# Altium PCB TITAN_ADAPTER.PcbDoc
Units mm, origin at the board's own origin, x right, y up, seen from the top; angles counter-clockwise.
Board outline 14.73 x 9.4 mm, 2 copper layers (Top Layer, Bottom Layer); 4 components, 7 nets, 22 pads, 0 vias.
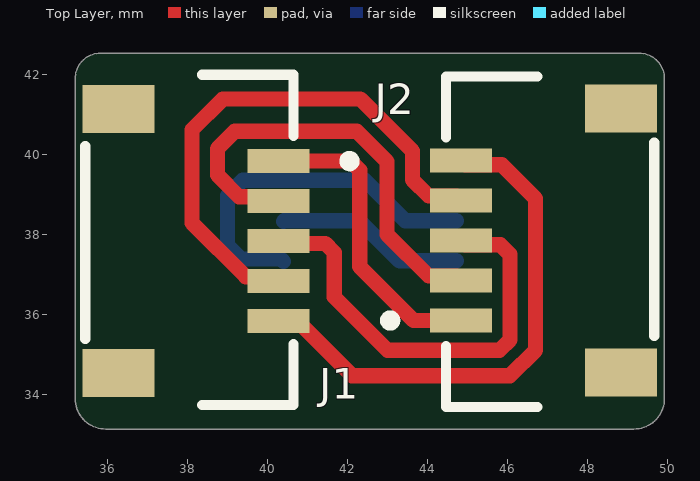
[diagram p0: Top Layer view]
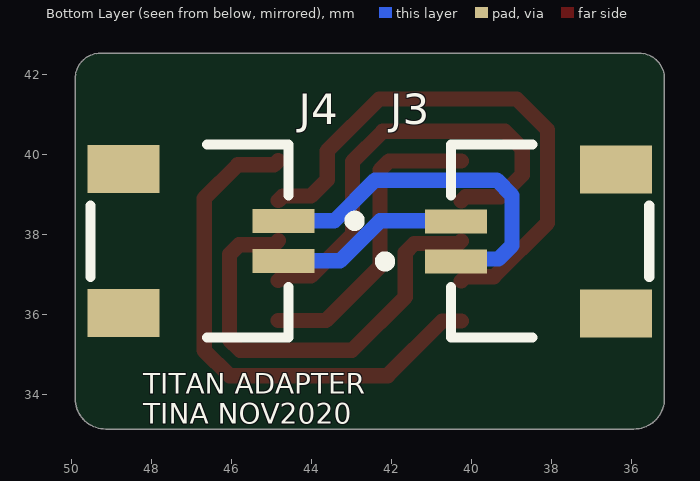
[diagram p1: Bottom Layer view, seen from below]

## Layer stack, top to bottom
Top Solder: solder mask 0.0102, Solder Resist, Dk 3.5
Top Layer: signal copper 0.0356
Dielectric 1: dielectric 0.32, FR-4, Dk 4.8
Bottom Layer: signal copper 0.0356
Bottom Solder: solder mask 0.0102, Solder Resist, Dk 3.5

## Board outline
35.179,33.909 35.179,41.91 cw(c35.814,41.91) 35.814,42.545 49.276,42.545 cw(c49.276,41.91) 49.911,41.91 49.911,33.909 cw(c49.149,33.909) 49.149,33.147 35.941,33.147 cw(c35.941,33.909)

## Design rules (kind name [scope] priority, off if disabled: settings)
Clearance [All] p1: gap=0.254 ignorepadtopadclearanceinfootprint=FALSE except(0: Arc-Hole Track-Hole SMDPad-Hole THPad-Hole Via-Hole Fill-Hole Poly-Hole Region-Hole Text-Hole)
PolygonConnect [All] p1: connectstyle=Relief reliefconductorwidth=0.254 reliefentries=4 polygonreliefangle="90 Angle" airgapwidth=0.254
RoomDefinition TITAN_ADAPTER [InComponentClass('TITAN_ADAPTER')] p1: confinementstyle=ConfineIn formatcopy=TRUE lockcomponents=FALSE outline 26.416,27.432 58.166,27.432 58.166,48.641 26.416,48.641
RoutingVias [All] p1: holewidth=0.711 width=1.27 viastyle="Through Hole" minholewidth=0.711 minwidth=1.27 maxholewidth=0.711 maxwidth=1.27
SolderMaskExpansion [All] p1: expansion=0.102 istentingtop=FALSE
Width [All] p1: maxlimit=0.762 minlimit=0.254 preferedwidth=0.381
30 further rules are at their usual default settings.

## Components (designator, comment, footprint, x,y, rotation, side; value= is the part's Value field where it differs from the comment)
J1 "JST 5POS" JST-5 44.831,35.862 r90 top
J2 "JST 5POS" JST-5 40.259,39.846 r270 top
J3 "JST 2POS" JST-2 40.386,37.338 r90 bottom
J4 "JST 2POS" JST-2 44.704,38.354 r270 bottom

## Footprints (in the part's own frame and the unit in brackets; to place one, negate y for a bottom-side part, rotate by r counter-clockwise, add the part's x,y. Pads: shape width x height; smd on the part's side, far side on the other; paste and mask are expansions set on the pad)
JST-2 [mm]
  rect 1.2x1.8 smd: 0(-1.3,-4) 0(2.3,-4)
  rect 0.6x1.55 smd: 1(0,0) 2(1,0)
  silkscreen extent -1.91,-4.83 2.92,1.91, body extent -1.46,-4.63 2.54,0.32, height 2.97
JST-5 [mm]
  rect 1.2x1.8 smd: 0(-1.3,-4) 0(5.3,-4)
  rect 0.6x1.55 smd: 1(0,0) 2(1,0) 3(2,0) 4(3,0) 5(4,0)
  silkscreen extent -2.16,-4.83 6.1,1.9, body extent -1.47,-4.57 5.53,0.38, height 2.97

## Part data
J1 J2: library part SM05B-SRSS-TB(LF)(SN), "CONN HEADER SMD R/A 5POS 1MM, side mount", Color=Natural, Contact Resistance=40mR, Current Rating=1A, Flammability Rating="UL94 V-0", Housing Color=Beige, Insulation Resistance=100MR, Manufacturer=JST, Max Operating Temperature=85°C, Max Voltage Rating (AC)=50V, Min Operating Temperature=-25°C, Supplier Part Number 1=455-1805-1-ND, Category=Connectors, ComponentLink1Description=https://datasheet.ciiva.com/11752/0900766b8082f543-11752177.pdf?src-supplier=RSComponents, ComponentLink1URL=https://datasheet.ciiva.com/11752/0900766b8082f543-11752177.pdf?src-supplier=RSComponents, ComponentLink2Description=https://datasheet.ciiva.com/26894/getdatasheetpartid-473065-26894947.pdf?src-supplier=Verical, ComponentLink2URL=https://datasheet.ciiva.com/26894/getdatasheetpartid-473065-26894947.pdf?src-supplier=Verical, ComponentLink3Description=https://datasheet.ciiva.com/26938/getdatasheetpartid-744366-26938333.pdf?src-supplier=Verical, ComponentLink3URL=https://datasheet.ciiva.com/26938/getdatasheetpartid-744366-26938333.pdf?src-supplier=Verical, ComponentLink4Description=https://datasheet.ciiva.com/16217/sm05b-srss-tblfsn-16217550.pdf?src-supplier=Future+Electronics, ComponentLink4URL=https://datasheet.ciiva.com/16217/sm05b-srss-tblfsn-16217550.pdf?src-supplier=Future+Electronics, ComponentLink5Description=https://datasheet.ciiva.com/712/esr-712752.pdf?src-supplier=Digi-Key, ComponentLink5URL=https://datasheet.ciiva.com/712/esr-712752.pdf?src-supplier=Digi-Key, ComponentLink6Description=https://datasheet.ciiva.com/8052/esr-8052277.pdf?src-supplier=Element14, ComponentLink6URL=https://datasheet.ciiva.com/8052/esr-8052277.pdf?src-supplier=Element14, ComponentLink7Description=https://datasheet.ciiva.com/730/esr-730646.pdf?src-supplier=Digi-Key, ComponentLink7URL=https://datasheet.ciiva.com/730/esr-730646.pdf?src-supplier=Digi-Key, ComponentLink8Description=https://datasheet.ciiva.com/712/esr-712751.pdf?src-supplier=Digi-Key, ComponentLink8URL=https://datasheet.ciiva.com/712/esr-712751.pdf?src-supplier=Digi-Key, Connector Type="Male Pin", Contact Material="Copper Alloy", Contact Plating=Tin,Copper,Lead, Depth=4.95mm, Gender=Male, Housing Material=Polyamide, Lead Free="Lead Free", Lead Pitch=1mm, Length=7mm, Manufacturer Part Number=SM05B-SRSS-TB(LF)(SN), Material=Polyamide, Max Current Rating=1A, Max Voltage Rating (DC)=50V, Mount="Surface Mount", Number of Contacts=5, Number of Positions=5, Number of Rows=1, Orientation="Right Angle", Packaging="Tape and Reel", Pitch=1mm, Pricing 1="1=0.68000, 10=0.64200, 100=0.49200, 500=0.42782, 1000=0.35294 (USD)", REACH SVHC="No SVHC", RoHS=Yes, Stock 1=368198, Supplier 1=Digi-Key, Termination=Solder, Voltage Rating=50V, Voltage Rating (AC)=50V
J3 J4: library part SM02B-SRSS-TB(LF)(SN), "Conn Shrouded Header HDR 2 POS 1mm Solder RA SMD T/R, side mount", Color=Natural, Contact Resistance=40mR, Current Rating=700mA, Flammability Rating="UL94 V-0", Housing Color=Beige, Insulation Resistance=100MR, Manufacturer=JST, Max Current Rating=1A, Max Operating Temperature=85°C, Max Voltage Rating (AC)=50V, Min Operating Temperature=-25°C, Supplier Part Number 1=33P8179, Category=Connectors, ComponentLink1Description=https://datasheet.ciiva.com/26924/getdatasheetpartid-640850-26924055.pdf?src-supplier=Verical, ComponentLink1URL=https://datasheet.ciiva.com/26924/getdatasheetpartid-640850-26924055.pdf?src-supplier=Verical, ComponentLink2Description=https://datasheet.ciiva.com/16391/sm02b-srss-tblfsn-16391308.pdf?src-supplier=Future+Electronics, ComponentLink2URL=https://datasheet.ciiva.com/16391/sm02b-srss-tblfsn-16391308.pdf?src-supplier=Future+Electronics, ComponentLink3Description=https://datasheet.ciiva.com/712/esr-712467.pdf?src-supplier=Digi-Key, ComponentLink3URL=https://datasheet.ciiva.com/712/esr-712467.pdf?src-supplier=Digi-Key, ComponentLink4Description=https://datasheet.ciiva.com/712/esr-712468.pdf?src-supplier=Digi-Key, ComponentLink4URL=https://datasheet.ciiva.com/712/esr-712468.pdf?src-supplier=Digi-Key, ComponentLink5Description=https://datasheet.ciiva.com/730/esr-730600.pdf?src-supplier=Digi-Key, ComponentLink5URL=https://datasheet.ciiva.com/730/esr-730600.pdf?src-supplier=Digi-Key, ComponentLink6Description=https://datasheet.ciiva.com/8052/91630-8052284.pdf?src-supplier=Element14, ComponentLink6URL=https://datasheet.ciiva.com/8052/91630-8052284.pdf?src-supplier=Element14, Connector Type="Header,Male Pin", Contact Material="Copper Alloy,Copper", Contact Plating=Tin,Copper,Lead, Contact Shape=Square, Depth=4.95mm, Fastening Type=Push,Pull, Housing Material=Polyamide, Insulation Color=Natural, Insulation Material=Nylon, Lead Free="Lead Free", Lead Pitch=1mm, Length=4mm, Manufacturer Part Number=SM02B-SRSS-TB(LF)(SN), Material=Polyamide, Mount="Surface Mount", Number of Contacts=2, Number of Positions=2, Number of Rows=1, Orientation="Right Angle", Packaging="Tape and Reel", Pitch=1mm, Pricing 1="1=0.41900, 10=0.39400, 25=0.33800, 50=0.29800, 100=0.29600, 250=0.27100, 500=0.25500, 1000=0.23500 (USD)", REACH SVHC="No SVHC", RoHS=Yes, Stock 1=9138, Supplier 1=Newark, Termination=Solder, Voltage Rating=50V, Voltage Rating (AC)=50V

## Nets (pads, with @x,y where several pads share a name; then routed paths per layer and width w, separated by ;. In a path a pad name is that pad's centre, name@x,y a point inside that pad or via, vN(x,y) a via of type N, cw(c..) or ccw(c..) an arc to the next point about the centre after c; other vN are vias at no path point)
B1: J3.1 J4.1 | length 9.1
  Bottom Layer w0.381: J3.1 40.324,37.4 39.327,37.4 38.989,37.738 38.989,38.989 39.37,39.37 42.418,39.37 43.434,38.354 J4.1
B2: J3.2 J4.2 | length 4.7
  Bottom Layer w0.381: J3.2 40.402,38.354 42.291,38.354 43.291,37.354 J4.2
T1: J1.1 J2.1 | length 7.6
  Top Layer w0.381: J2.1 42.068,39.846 42.291,39.623 42.291,37.211 43.64,35.862 J1.1
T2: J1.2 J2.2 | length 11.3
  Top Layer w0.381: J2.2 40.15,38.955 39.277,38.955 38.735,39.497 38.735,40.158 39.167,40.591 42.221,40.591 42.977,39.835 42.977,38.013 44.018,36.971 44.722,36.971 J1.2
T3: J1.3 J2.3 | length 11.2
  Top Layer w0.381: J2.3 40.321,37.784 41.433,37.784 41.656,37.56 41.656,36.449 42.988,35.117 45.79,35.117 46.05,35.378 46.05,37.516 45.814,37.753 44.94,37.753 J1.3
T4: J1.4 J2.4 | length 13.6
  Top Layer w0.381: J2.4 40.15,36.955 39.446,36.955 38.1,38.301 38.1,40.63 38.872,41.402 42.308,41.402 43.612,40.098 43.612,39.378 44.018,38.971 44.722,38.971 J1.4
T5: J1.5 J2.5 | length 13.3
  Top Layer w0.381: J2.5 40.734,35.846 42.098,34.482 46.053,34.482 46.685,35.115 46.685,38.913 45.845,39.753 44.94,39.753 J1.5
pads on no net: J1.0 J2.0 J3.0 J4.0

## Silkscreen, mask and mechanical layers (free items; w line width, h text height)
Bottom Overlay:
  text "TITAN ADAPTER / TINA NOV2020" at 48.212,33.274 h0.51
Mechanical 3:
  the board outline again, w0.254